# Altium PCB JWB-001.PcbDoc (part 2 of 2)
Units mil, origin at the board's own origin, x right, y up, seen from the top; angles counter-clockwise.
Board outline 944.88 x 944.88 mil, 4 copper layers (Top, Layer 2, Layer 3, Bottom), stack 35.2 mil thick; 91 components, 70 nets, 351 pads, 136 vias.
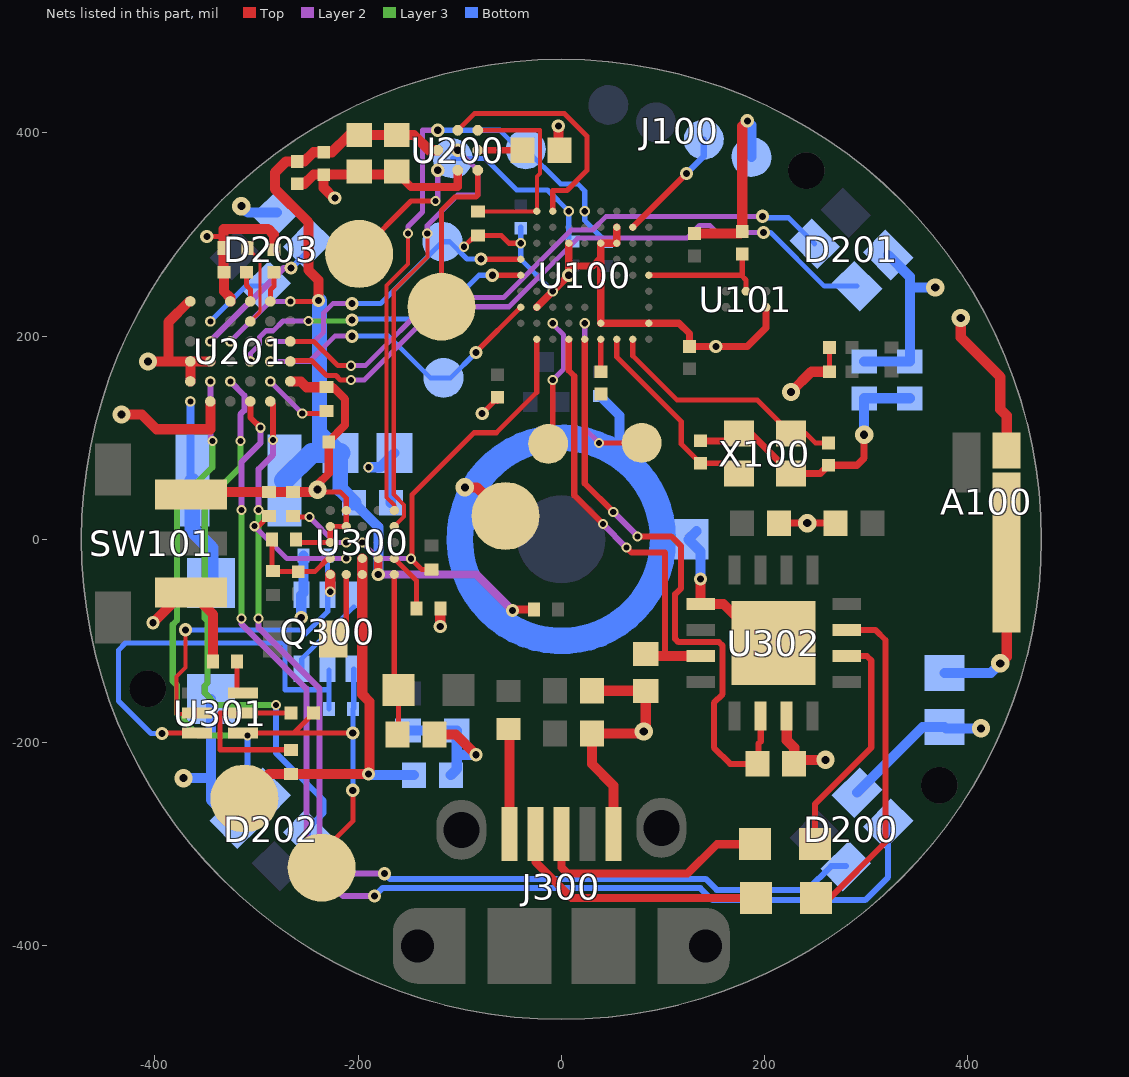
[diagram p4: the nets of this part, all layers, seen from the top]

## Via types
v1: diameter 13, hole 7, Top to Bottom, 27 vias
v2: diameter 10, hole 6, Top to Layer 2, 26 vias
v3: diameter 10, hole 6, Top to Layer 2, tented top, 17 vias
v4: diameter 10, hole 6, Layer 2 to Layer 3, 10 vias
v5: diameter 10, hole 6, Top to Bottom, tented both sides, 8 vias
v6: diameter 13, hole 7, Top to Layer 2, 7 vias
v7: diameter 13, hole 7, Layer 3 to Bottom, 6 vias
v8: diameter 13, hole 7, Top to Bottom, tented both sides, 6 vias
v9: diameter 18, hole 8, Top to Layer 2, tented top, 5 vias
v10: diameter 18, hole 8, Top to Bottom, tented both sides, 5 vias
v11: diameter 18, hole 8, Layer 3 to Bottom, tented bottom, 5 vias
v12: diameter 13, hole 7, Top to Layer 2, tented top, 4 vias
v13: diameter 18, hole 8, Top to Layer 2, 2 vias
v14: diameter 10, hole 6, Layer 3 to Bottom, tented bottom, 2 vias
v15: diameter 10, hole 6, Top to Bottom, 2 vias
v16: diameter 10, hole 6, Top to Bottom, tented top, 1 vias
v17: diameter 10, hole 6, Layer 3 to Bottom, 1 vias
v18: diameter 28, hole 16, Top to Bottom, 1 vias
v19: diameter 13, hole 7, Top to Bottom, tented top, 1 vias

## Nets (pads, with @x,y where several pads share a name; then routed paths per layer and width w, separated by ;. In a path a pad name is that pad's centre, name@x,y a point inside that pad or via, vN(x,y) a via of type N, cw(c..) or ccw(c..) an arc to the next point about the centre after c; other vN are vias at no path point) (continued)
GND: A100.2 A100.3 C100.2 C101.2 C102.2 C104.2 C105.2 C107.2 C108.2 C109.2 C110.2 C111.2 C200.2 C201.2 C204.2 C205.2 C206.2 C207.2 C208.2 C209.2 C210.2 C211.2 C213.2 C214.1 C300.2 C301.2 C302.2 C304.2 C305.2 C307.2 C308.2 C309.2 D301.2 D302.1 D303.2 J100.4 J300.5 Q300.1 R105.1 R200.1 R201.1 R202.1 R300.1 R301.1 R304.1 R307.1 R311.1 RT300.2 SW100.2 SW101.1 TP_GND.1 U100.B1 U100.B4 U100.C8 U100.D7 U100.G3 U100.G4 U100.G6 U100.G9 U100.H3 U101.B1 U200.B3 U201.A5 U201.D1 U201.E4 U201.F1 U201.F4 U201.F5 U300.A2 U300.B1 U300.B2 U300.C1 U300.E1 U302.3 U302.13 U302.17 X100.2 X100.4 | length 3513
  Top w5: v12(-349,298) -333.62,298 -332.62,297 ; R304.1@-258.19,-3 U300.C1@-227.5,-3 U300.B1@-227.5,12.75 U300.B2@-211.75,12.75 U300.A2@-211.75,28.5 -211.75,40.75 -217.81,46.81 v13@-242.19,46.81 ; v3(-96,288) -84.81,299.19 R200.1@-82,299.19 -59.19,299.19 -51.5,291.5 v5(-39.99,291.5) ; v12(-77.98,124) -63,138.98 C104.2@-63,136 ; C108.2@263.98,165 C107.2@263.98,189
  Top w7: U100.C8@-24.24,228.5 v5(-8.5,244.25) v6(7.25,260) 7.25,269 ; U100.G6@7.25,291.5 7.25,269 ; U100.H3@54.5,307.24 U100.G3@54.5,291.5 U100.G4@38.75,291.5 38.75,276.75 ; C102.2@137,97.02 167.7,97.02 X100.2@174.78,104.09 186.59,104.09 X100.4@225.96,64.72 254.75,64.72 C101.2@263,72.98 290.98,72.98 298,80 v10(298,103) ; U101.B1@201.37,228.5 201.37,208.37 183,190 v6(152,190) C105.2@126,190 126,202.51 115.76,212.76 U100.B1@85.99,212.76 U100.B4@38.75,212.76 38.75,276.75 ; C309.2@214.11,16 C308.2@269.89,16 ; 7.25,269 31,269 38.75,276.75
  Top w8: v13(-240,49) -240,54 -229.02,64.98 C211.2@-229.02,96 ; R202.1@-231,149.81 -224.81,149.81 -213,138 -213,112.47 C211.2@-229.02,96.45 ; C209.2@-162,361 -148,347 -102,347 U200.B3@-102,363.32
  Top w10: v9(-406.84,175.16) -386.84,175.16 ; v6(-402,-82) -372.23,-52.23 SW101.1@-364.57,-52.23 -342.81,-73.98 R307.1@-342.81,-120 ; U201.F1@-366.47,234.21 -386.84,213.84 -386.84,175.16 ; U201.F5@-365.21,155.47 U201.F4@-365.21,175.16 ; SW101.1@-361.98,46.81 R301.1@-288,46.81 RT300.2@-264,46.81 v13@-242.19,46.81 ; U201.E4@-345.53,175.16 U201.F4@-365.21,175.16 ; U201.D1@-325.84,234.21 -325.84,237.84 -332.02,244.02 C214.1@-332.02,263 -332.62,263.6 R201.1@-332.62,287 -332.62,297 -332.62,305.62 -288.62,305.62 -283,300 C213.2@-283,285 ; U201.A5@-266.79,155.47 -256.47,155.47 -250.81,149.81 R202.1@-231,149.81 ; C206.2@-260,350 -253,350 -244,359 C207.2@-234,359 ; v3(-227.5,-51.5) U300.E1@-227.5,-34.5 ; v6(-223,336) -224,336 -234,346 C207.2@-234,359 ; C209.2@-164.89,359 C207.2@-234,359 ; C301.2@-124.89,-192 -104,-192 v1(-84,-212) ; v6(-119.19,-85.81) R300.1@-119.19,-68 ; v13(-95,51.19) -83.19,51.19 TP_GND.1@-55,23 ; C210.2@-3,384.11 v12(-3,407) ; C307.2@30.11,-149 82.89,-149 D302.1@83,-149.11 v9@83,-187 ; J300.5@51.18,-289.74 51.18,-242.18 30.11,-221.11 D301.2@30.11,-191 v9@79,-191 ; C109.2@131,301.02 C110.2@176,301.02 ; U302.13@137,-63.46 v19(137,-39) ; U302.13@137.15,-63.61 159.61,-63.61 198,-102 U302.17@209,-102 ; C110.2@178,303.02 178,407 ; U302.3@221.8,-173.85 221.8,-197.8 229.11,-205.11 D303.2@229.11,-221 ; v10(226,145) 246,165 C108.2@263.98,165 ; D303.2@233.11,-217 v9(260,-217) ; v9(393,218) 393,199 432,160 432,128 438.29,121.71 A100.3@438.29,87.28 ; v10@438.29,-115.71 A100.2@438.29,-13.11 ; -386.84,175.16 U201.F4@-365.21,175.16
  Bottom w5: C111.2@-39.99,307.24 -39.99,275.75 v5(-8.5,244.25)
  Bottom w10: v1(-256,-77) -256,-54.99 Q300.1@-255.59,-54.58 ; Q300.1@-253.81,-52.8 R311.1@-253.81,-16 ; v5(-190,71) -178.43,71 C205.2@-167.89,81.54 ; C302.2@-167.89,36 C205.2@-167.89,81.54 ; C205.2@-164.43,85 C205.2@-167.89,81.54 ; C304.2@-151,-188.11 C305.2@-103,-188.11 -103,-226.11 C300.2@-108.89,-232 ; -98.11,-212 v1(-84,-212) ; R105.1@38,141.19 57.19,122 57.19,87.56 53.88,84.24 ; SW100.2@133,8 SW100.2@125,0 137,-12 v19(137,-39) ; v1(183,412) 187.12,407.88 J100.4@187.12,376.35 ; v10(298,103) C200.2@298,138.89 C201.2@343,138.89 ; C204.2@377,-131.43 422.57,-131.43 v10(432,-122)
  other v9: 81,-189 242,16
GREEN1: D200.3 U201.B6 | length 1015.4
  Top w6: v2(-283.98,97.98) U201.B6@-283.98,133.29
  Layer 2 w6: v4(-298,-78) -298,-87 -238,-147 -238,-309 -218,-329 v1(-174,-329) ; v4(-298,29) -298,69.04 -284.02,83.02 -284.02,97.94 v2(-283.98,97.98)
  Layer 3 w6: v4(-298,-78) v4(-298,29)
  Bottom w6: v1(-174,-329) -168.86,-334.14 142,-334.14 152.86,-345 242,-345 265.38,-321.62 D200.3@279.87,-321.62
GREEN2: D201.3 U201.A3 | length 596.1
  Top w5: U201.A3@-266.79,194.84 -243.84,194.84 -219.96,170.96 v2(-207.04,170.96)
  Layer 2 w5: v2(-207.04,170.96) -193.04,170.96 -126,238 -56.86,238 9.64,304.49 30.66,304.49 44.17,318 v1(198,318)
  Bottom w5: v1@199.38,316.62 223.62,316.62 D201.3@249.24,291
GREEN3: D202.3 U201.D5 | length 559.2
  Layer 2 w6: v2(-325.84,155.47) -312,141.63 -312,127 -316,123 v4(-316,97)
  Layer 3 w6: v4(-316,97) -316,71 -351,36 -351,-77.59 -348.5,-80.09 -348.5,-141.5 -351,-144 -351,-151 -339,-163 v17(-281,-163)
  Bottom w6: v17(-281,-163) -281,-210 -234,-257 -234,-269 -249.24,-284.24 D202.3@-249.24,-291
GREEN4: D203.3 U201.E2 | length 68.9
  Bottom w5: v15(-345.53,214.53) -310.81,249.24 D203.3@-291,249.24
HAP_EN: R200.2 U100.J8 U200.A1 | length 200.6
  Top w4: U200.A1@-82.31,402.69 -21.31,402.69 -21,403 -21,360 -24,357 -24,323.24 U100.J8@-24.24,322.99 -24.43,322.81 R200.2@-82,322.81
HAP_TRIG: U100.J7 U200.B1 | length 239
  Top w5: U200.B1@-102,402.69 -85.68,419 3,419 25,397 25,363 5.5,343.5 -8.5,343.5 U100.J7@-8.5,322.99
NetC100_1: C100.1 U100.A4 | length 31.7
  Top w5: C100.1@38.75,165.28 U100.A4@38.75,197.01
NetC101_1: C101.1 U100.A2 X100.1 | length 244.5
  Top w5: U100.A2@70.24,197.01 70.24,180.76 114,137 193.05,137 X100.1@225.96,104.09 240.91,104.09 249.98,95.02 C101.1@263,95.02
NetC102_1: C102.1 U100.A3 X100.3 | length 198.2
  Top w5: U100.A3@54.5,197.01 54.5,179.5 118,116 118,93.98 C102.1@137,74.98 164.52,74.98 X100.3@174.78,64.72
NetC110_1: C110.1 U100.E1 U101.A2 | length 130.1
  Top w5: U100.E1@85.99,260 177,260 ; C110.1@178,280.98 178,261 177,260 ; U101.A2@181.68,244.25 181.68,255.31 177,260
NetC210_1: C210.1 U200.A2 | length 44.2
  Top w6: U200.A2@-82.31,383 C210.1@-38.11,383
NetC213_1: C213.1 U201.B1 | length 30.2
  Top w5: U201.B1@-286.47,234.21 -286.47,245.47 -283,248.94 C213.1@-283,262.95
NetC214_2: C214.2 U201.C1 | length 30.4
  Top w5: C214.2@-309.98,263 -309.98,249.98 -306.16,246.16 U201.C1@-306.16,234.21
NetC301_1: C301.1 D300.C U300.E5 | length 153.8
  Top w5: D300.C@-164.5,-144.02 U300.E5@-164.5,-34.5 ; C301.1@-161.11,-192 -160.53,-191.42 D300.C@-160.53,-148
NetC303_2: C303.2 R304.2 R305.1 U300.D1 | length 98.1
  Top w5: R304.2@-288,3.19 R304.2@-284.81,0 -284.81,-30.19 R305.1@-284,-31 -283.21,-31.79 C303.2@-259,-31.79 -242.79,-31.79 -229.75,-18.75 U300.D1@-227.5,-18.75
NetC306_1: C306.1 R303.1 U301.5 | length 175.8
  Top w5: R303.1@-266.19,-207 -336,-207 -336,-171 U301.5@-313.36,-171 C306.1@-266.02,-171
NetC306_2: C306.2 Q300.4 R312.1 TP_BATT-.1 U301.4 | length 343.3
  Top w5: U301.4@-313.36,-190.68 -263.66,-190.68 ; C306.2@-243.98,-171 -263.66,-190.68 ; TP_BATT-.1@-236,-323 -236,-308 -205.32,-277.32 v1(-205.32,-247) ; v1(-205.32,-190.68) -263.66,-190.68
  Bottom w5: v1(-205.32,-247) v1(-205.32,-190.68) R312.1@-205.32,-167.13 ; R312.1@-204.41,-166.22 Q300.4@-204.41,-127.42
NetD204_A: D204.A L200.2 U201.F6 | length 187.1
  Bottom w8: v15(-365.21,135.79) -365.21,59.94 L200.2@-363.28,58
  Bottom w15: L200.2@-363.28,58 -363.28,9.28 -345,-9 D204.A@-345,-42.91
NetJ100_3: J100.3 U100.H2 | length 115.2
  Top w6: U100.H2@70.24,307.24 v1(123,360)
  Bottom w6: v1(123,360) 140.14,377.14 J100.3@140.14,393.45
NetJ300_1: J300.1 R308.1 | length 102.2
  Top w10: J300.1@-51.18,-289.74 R308.1@-51.18,-187.52
NetJ300_2: J300.2 R309.1 | length 259.5
  Top w8: J300.2@-25.59,-289.74 -25.59,-317.41 10,-353 R309.1@191.47,-353
NetJ300_3: J300.3 R310.1 | length 238.2
  Top w8: J300.3@0,-289.74 0,-323 6,-329 124,-329 153,-300 R310.1@190.47,-300
NetL300_1: L300.1 U300.E2 | length 68.8
  Top w5: L300.1@-224.44,-98 -211.75,-85.31 U300.E2@-211.75,-34.5
NetQ300_2: Q300.2 R311.2 U301.2 | length 311.7
  Top w4: v1(-370,-89) -370,-126 -379,-135 -379,-172 U301.2@-359.64,-172
  Bottom w5: v1(-370,-89) -256,-89 -252,-93 -230,-71 Q300.2@-230,-54.58 ; Q300.2@-230.19,-54.39 R311.2@-230.19,-16
NetQ300_3: Q300.3 Q300.6 | length 82.2
  Bottom w5: Q300.6@-255.59,-127.42 -255.59,-117.59 Q300.3@-204.41,-66.41
NetQ300_5: Q300.5 R312.2 U301.3 | length 434.8
  Top w5: v1@-392.68,-190.68 U301.3@-358.64,-190.68
  Bottom w5: v1(-393,-191) -404,-191 -436,-159 -436,-109 -429,-102 -272,-102 -272,-148 -228.81,-148 ; R312.2@-228.81,-167 -228.81,-148 ; Q300.5@-228.81,-128.61 -228.81,-148
NetR201_2: R201.2 U201.C2 | length 81.7
  Top w3: R201.2@-309,287 -296.5,274.5 -296.5,224.19 U201.C2@-306.16,214.53
NetR202_2: R202.2 U201.B5 | length 66.3
  Top w5: v2(-255.04,123.96) R202.2@-233.23,123.96
  Layer 2 w5: v2(-286.47,155.47) v2(-255.04,123.96)
NetR300_2: R300.2 U300.D5 | length 58.2
  Top w5: U300.D5@-164.5,-18.75 -142.81,-40.44 R300.2@-142.81,-68
NetR301_2: R301.2 U300.D2 | length 121.6
  Top w5: v3(-302,13) -298.19,13 R301.2@-288,23.19
  Layer 2 w5: v3(-302,13) -270.25,-18.75 v3(-211.75,-18.75)
NetR307_2: R307.2 U301.6 | length 25.5
  Top w5: -319.19,-145.49 R307.2@-319.19,-120
NetR309_2: R309.2 U302.7 | length 332.5
  Top w6: R309.2@250.53,-353 264,-353 319,-298 319,-99 309.2,-89.2 U302.7@280.85,-89.2
NetR310_2: R310.2 U302.6 | length 229.9
  Top w6: R310.2@249.53,-300 249.53,-260.47 305,-205 305,-119 300.8,-114.8 U302.6@280.85,-114.8
NetRT300_1: RT300.1 U300.C2 | length 63.1
  Top w5: RT300.1@-264,23.19 -262.81,22 v3(-248,22)
  Layer 2 w5: v3(-248,22) -223,-3 v3(-211.75,-3)
NetTP_LRA+_1: TP_LRA+.1 U200.A3 | length 161.4
  Top w5: TP_LRA+.1@-118,229 -118,324 -105,337 -84,337 -82.31,338.69 U200.A3@-82.31,363.32
NetTP_LRA-_1: TP_LRA-.1 U200.C3 | length 124.1
  Top w5: TP_LRA-.1@-199,282 -148,333 v3(-124,333)
  Layer 2 w5: v3@-121.68,335.32 v12(-121.68,363.32)
PMIC_INT: R306.1 U100.A8 U300.C3 | length 359.3
  Top w5: R306.1@-128,-29.81 -137.19,-29.81 v3(-148,-19) -147,-18 -147,44 -86,105 -64,105 -24.24,144.76 U100.A8@-24.24,197.01
  Layer 2 w5: v3(-196,-3) -180,-19 v3(-148,-19)
RED1: D200.4 U201.C6 | length 1141.8
  Top w6: U201.C6@-306,135.63 -306,119.92 v2(-296.04,109.96)
  Layer 2 w6: -315,-83 -251,-147 -251,-315 -215,-351 v1(-184,-351) ; v4(-315,29) -315,76.08 -296.04,95.04 v2(-296.04,109.96) v2(-296.04,109.96)
  Layer 3 w6: v4(-315,-78) v4(-315,29)
  Bottom w6: v1(-184,-351) -176.14,-343.14 136.86,-343.14 148.72,-355 299,-355 321.62,-332.38 D200.4@321.62,-279.86
RED2: D201.4 U201.A4 | length 652.5
  Top w5: U201.A4@-265.94,176 -246,176 -231.22,161.22 -221.83,161.22 -217.62,157 v2(-207,157)
  Layer 2 w5: v2(-207,157) -194,157 -122,229 -51.49,229 16,296.49 123.49,296.49 136,309 146,309 153,302 v1(199,302)
  Bottom w5: v1(199,302) 206,302 258.76,249.24 D201.4@291,249.24
RED3: D202.4 U201.E5 | length 488.1
  Layer 2 w6: v4@-345.53,99.03 v2(-345.53,155.47)
  Layer 3 w6: v4(-343.5,97) -343.5,71 -378.5,36 -378.5,-79.82 -382.5,-83.82 -382.5,-139.5 -378.5,-143.5 -378.5,-171.5 -357,-193 v14(-309,-193)
  Bottom w6: v14(-309,-193) -309,-231.24 D202.4@-291,-249.24 D202.4@-291,-246
RED4: D203.4 U201.E3 | length 140.4
  Layer 2 w6: v2(-345.53,194.84) -273.37,267 v1(-266,267)
  Bottom w6: v1(-266,267) -249.24,283.76 D203.4@-249.24,291
SCL: R101.1 TP_SCL.1 U100.J5 U200.C1 U300.A5 | length 635.2
  Top w4: U300.A5@-164.5,28.5 -164.5,33.6 -172,41.1 -172,250 -151,271 v3(-151,301)
  Layer 2 w5: v3(-151,301) -151,308 -136.68,322.32 -136.68,402.69 v8(-121.68,402.69)
  Bottom w5: v8(-121.68,402.69) -60.69,402.69 -42,384 TP_SCL.1@-35,384 -1,350 16,350 23,343 v5(23,322.99) 23,313.81 R101.1@44,292.81
SCLK: TP_SCLk.1 U100.F9 U201.B3 | length 305.1
  Top w5: v1@-78.75,275.75 U100.F9@-39.99,275.75
  Layer 2 w5: v2(-286.47,194.84) -243.16,194.84 -234,204 -234,223 -225,232 v1(-206,232)
  Bottom w5: v1(-206,232) -178,232 TP_SCLk.1@-117,293 -110,293 -93,276 v1(-79,276)
SDA: R102.1 TP_SDA.1 U100.J6 U200.B2 U300.B5 | length 594.3
  Top w4: U300.B5@-164.5,12.75 -164.5,13.07 -155,22.57 -155,34 -165,44 -165,245 -132,278 v3(-132,301)
  Layer 2 w5: v3(-132,301) -132,309 -102,339 -82.31,339 -82.31,363.31 v8(-102,383)
  Bottom w5: TP_SDA.1@-107,375 -75,375 -44,344 -13.76,344 v5(7.25,322.99) R102.1@7.25,296.75
SDI: TP_SDI.1 U100.C9 U201.B4 | length 302.3
  Top w5: v1@-84,184.5 U100.C9@-39.99,228.5
  Layer 2 w5: v2(-286.47,175.16) -247.84,175.16 -223,200 v1(-206,200)
  Bottom w5: v1(-206,200) -170,200 -129,159 TP_SDI.1@-116,159 -109,159 v1(-84,184)
SDO: TP_SDO.1 U100.E9 U201.C4 | length 308.2
  Top w5: v1(-68,260) U100.E9@-39.99,260
  Layer 2 w5: v2(-306.16,175.16) -306.16,182.84 -296.97,192.03 -296.97,199.19 -290.82,205.34 -283.66,205.34 -274,215 v4(-249,215)
  Layer 3 w5: v4(-249,215) v7@-207,215
  Bottom w5: v7@-206,217 -124,217 TP_SDO.1@-117,224 -81,260 v1(-68,260)
  other v7: -206,216
TP1: TP1.1 U100.B7 | length 122.1
  Top w5: TP1.1@-8.5,98.5 v3(-8.5,157)
  Layer 2 w5: v3(-8.5,157) 2,167.5 2,201.36 v3@-8.5,211.86
  other v3: -8.5,212.76
TP2: TP2.1 U100.B5 | length 165.6
  Top w5: v3(37,95) TP2.1@79,95
  Layer 2 w5: v3(23,212.76) 23,156 23,109 v3(37,95)
USB_UART_RX: D303.1 U100.A5 U302.2 | length 607.5
  Top w6: U100.A5@23,197.01 23,55 v2(51,27) ; v2(75,3) 108,3 117.75,-6.75 117.75,-48.25 112,-54 112,-98 115.11,-101.11 153.81,-101.11 153.92,-101 155,-101 158.71,-104.71 158.71,-152.29 150,-161 150,-205 166,-221 D303.1@192.89,-221 194,-219.89 194,-201 196.2,-198.8 U302.2@196.2,-173.85
  Layer 2 w6: v2(51,27) v2(75,3)
USB_UART_TX: D302.2 U100.A6 U302.15 | length 424.8
  Top w6: U100.A6@7.25,197.01 7.25,166.25 12.69,160.82 12.69,43.31 v2(41,15) ; v2(64,-8) 69,-13 101.73,-13 ; 102,-114.8 102,-13.27
  Top w10: D302.2@83,-112.89 84.91,-114.8 102,-114.8 U302.15@137.15,-114.8
  Layer 2 w6: v2(41,15) v2(64,-8)
VBATT: C300.1 R303.2 TP_BATT+.1 U300.D3 U300.E3 | length 391
  Top w7: v1(-189.81,-230.81) v1@-189,-230
  Top w10: TP_BATT+.1@-312,-255 -287.81,-230.81 R303.2@-266,-230.81 v1(-189.81,-230.81) ; U300.D3@-196,-18.75 U300.E3@-196,-34.5 -196,-152.5 -189,-159.5 v1@-189,-230
  Bottom w10: v1@-188.62,-232 C300.1@-145.11,-232
VLED: C200.1 C201.1 C204.1 D200.1 D201.1 D202.1 D203.1 D204.C U201.E6 | length 648
  Top w10: v10(-433,123) -413,123 -398.47,108.47 -345.53,108.47 U201.E6@-345.53,135.79
  Bottom w10: v11(-372,-235) -345,-235 ; D204.C@-345,-157.09 -345,-235 ; D202.1@-321.62,-279.87 -345,-256.49 -345,-235 ; v11(-315,328) -308.62,321.62 D203.1@-279.87,321.62 ; D200.1@291,-249.24 355.67,-184.57 C204.1@377,-184.57 ; C200.1@298,175.11 C201.1@343,175.11 343,258.49 D201.1@321.62,279.87 ; 344,248 v11(368,248) ; C204.1@378.43,-186 v11(413,-186)
VSYS: C205.1 C206.1 C207.1 C208.1 C209.1 C302.1 L200.1 R104.2 U200.C2 U201.A1 U201.D3 U300.D4 U300.E4 | length 979.4
  Top w5: v2(-266.79,234.21) v1@-239.79,234.21
  Top w8: v1(-180.25,-34.5) U300.D4@-180.25,-18.75 ; v6@-47,-69 R104.2@-27,-69
  Top w10: v1(-239,235) -239,255 -249,265 -249,312 -282,345 -282,361 -270.95,372.05 C206.1@-260,372.05 -252.95,372.05 -243.95,381.05 C207.1@-234,381.05 -225.95,381.05 -208.89,398.11 C208.1@-199,398.11 C209.1@-162,398.11 -145.11,398.11 -130,383 U200.C2@-121.68,383
  Layer 2 w5: v2(-325.84,194.84) -286.47,234.21 v2(-266.79,234.21)
  Layer 2 w8: v1(-180.25,-34.5) -83.5,-34.5 v6(-48,-70)
  Bottom w10: C302.1@-204.11,36 -180,11.89 v1@-180,-34.24
  Bottom w15: -238,96.43 -238,105.43 ; v1@-238,235 -238,105.43 ; C302.1@-204.11,36 -217.57,49.47 C205.1@-217.57,85 -238,105.43
  Bottom w20: L200.1@-272.72,58 -245.72,85 C205.1@-217.57,85
pads on no net: J300.4 J300.6 SW101.0 U100.B6 U100.B9 U100.C5 U100.C6 U100.C7 U100.D8 U100.E2 U100.E3 U100.E7 U100.E8 U100.F2 U100.F3 U100.F7 U100.F8 U100.G1 U100.G2 U100.G5 U100.G7 U100.G8 U100.H1 U100.H4 U100.H5 U100.H6 U100.H7 U100.J3 U100.J4 U201.D2 U201.D4 U201.F2 U300.A1 U300.A3 U300.A4 U300.B3 U300.B4 U300.C5 U301.1 U302.4 U302.5 U302.11 U302.12 U302.14 U302.16
copper on no net: | length 5.6
  Layer 2 w3: 56,195.5 54.5,197.01 57.99,197.01

## Polygon pours and split planes (outlines as drawn)
1V8 on Layer 3 "L3-1V8" (solid, remove dead copper, pour order 14): 363,108.54 363,230.78 363,234 253,344 201,396 201,397 -219,397 -220,398 -357.99,260.01 -364.7,260.01 -364.7,190.74 -399.8,155.64 -398.86,154.7 -398.86,-171.88 -398.86,-187.14 -265.85,-320.15 -244.67,-341.33 -194.94,-341.33 -169.37,-341.33 -159.66,-351.04 -159.32,-351.38 141.11,-351.38 206.62,-351.38 211,-347 353.56,-204.44 353.56,-98
VLED on Layer 3 "L3-VLED" (solid, remove dead copper, pour order 12): 363,-4.22 363,235 349,249 201,397 -42,397 -43,398 -219,398 -220,398 -330,288 -367.53,250.47 -399.8,155.64 -383.25,28.51 -399.96,-186.04 -346,-240 -265.85,-320.15 -161.28,-351.38 -159.66,-351.04 139.09,-350.96 202,-364 353.56,-98 460,-98 485.37,82.37 460,124.01 404.56,257.86 287.6,374.81 281.3,381.11 239.63,408.96 132.42,453.36 38.73,472 -49.45,472 -108.86,460.56 -250.88,403.76 -337.88,320.93 -379.83,269.82 -414.75,217.56 -430,180.74 -454.16,122.41 -458.4,79.4 -456.78,77.78 -456.78,-122.39 -456.78,-205.64 -374.81,-287.6 -195.42,-467 23.63,-467 158,-467 275,-417 574,-118 512,-56 512,55.73 480.35,130.33
GND on Layer 2 "L3-GND" (solid, remove dead copper, pour order 18): 461,107 415,218.05 415,262 414,262 254,422 191,485 -17,485 -232,485 -383,334 -485,232 -485,-249 -485,-251 -348,-388 -347,-388 -272,-463 -257,-478 281,-478 281,-455 511,-225 498,-212 498,137 498,150 415,233
GND on Top "Top-GND" (solid, remove dead copper, pour order 20): -540,512 -537,509 506,509 506,-520 510,-524 508,-522 -547,-522
GND on Bottom "Bottom-GND" (solid, remove dead copper, pour order 22): -551,528 565,528 599,494 584,479 584,-503 -548,-503 -551,-506

## Keep-outs
Keep-Out Layer:
  circle w3.94: c0,0 r472.44

## Silkscreen, mask and mechanical layers (free items; w line width, h text height)
Top Overlay:
  text "LRA-" at -232,215 h15
  text "LRA+" at -139,160 h15
  text "B+" at -264,-268 h15
  text "B-" at -254,-391 h15
Bottom Overlay:
  drawing of 659 lines, arcs and shapes, not listed
  text "v3.5" at 305,-92 h15
Board Outline:
  circle w3.94: c0,0 r472.44
TitleBlock_Top:
  lines w5: -2765,-840 -2565,-840 ; -2765,1285 -2565,1285 ; -2765,3410 -2565,3410 ; -2565,-1565 -2565,-2765 ; -15,-2965 -15,-2765 ; -15,5335 -15,5535 ; 2735,-2965 2735,-2765 ; 2735,5335 2735,5535 ; 3335,-2765 1935,-2765 -2565,-2765 ; 3535,-2465 8035,-2465 ; 3535,-2165 8035,-2165 ; 3535,-1865 5035,-1865 ; 5035,-2765 5035,-2165 5035,-1565 ; 5485,-2965 5485,-2765 ; 5485,5335 5485,5535 ; 7135,-2765 7135,-2165 ; 8035,-840 8235,-840 ; 8035,1285 8235,1285 ; 8035,3410 8235,3410 ; -2565,-2765 -2565,5335 8035,5335 8035,-2765 ; -2565,-2765 8035,-2765 ; 3535,-2765 2135,-2765 2135,-1565 3535,-1565 ; 3535,-2765 8035,-2765 ; 3535,-2765 3535,-1565 ; 3535,-1565 5035,-1565 ; 5035,-1565 8035,-1565 8035,-2765 ; -2765,-2965 8235,-2965 8235,5535 -2765,5535 -2765,-2965
  text "1" at -1413.66,5400 h70
  text "2" at 1337,5400 h70
  text "3" at 4082,5400 h70
  text "4" at 6833.01,5400 h70
  text "A" at -2690,4382 h70
  text "A" at 8110,4382 h70
  text "B" at -2690,2257 h70
  text "B" at 8110,2257 h70
  text "C" at -2690,132 h70
  text "C" at 8110,132 h70
  text "ENGINEER:" at 3585,-1665 h45
  text "TITLE:" at 5085,-1665 h45
  text ".Engineer" at 3985,-1775 h100
  text "PCB DESIGNER:" at 3585,-1960 h45
  text "D" at -2690,-1988 h70
  text "D" at 8110,-1988 h70
  text ".Engineer" at 4010,-2100 h100
  text "DATE:" at 3585,-2265 h45
  text "PART NO.:" at 5085,-2265 h45
  text "REV:" at 7185,-2265 h45
  text ".Company" at 2287,-2371 h70
  text ".PRINT_DATE" at 3635,-2385 h70
  text ".Address1" at 2287,-2471 h70
  text ".Address2" at 2290,-2563 h70
  text "FILE NAME:" at 3585,-2565 h45
  text "DWG NO:" at 5085,-2565 h45
  text "SCALE:" at 7185,-2565 h45
  text ".Address3" at 2285,-2665 h70
  text ".PCB_FILE_NAME_NO_PATH" at 3635,-2685 h70
  text "1" at -1413.66,-2900 h70
  text "2" at 1337,-2900 h70
  text "3" at 4082,-2900 h70
  text "4" at 6833.01,-2900 h70
Drill Drawing:
  drawing of 391 lines, arcs and shapes, not listed
  text "NOTES: UNLESS OTHERWISE SPECIFIED" at 4120,4805 h60
  text "1. MATERIAL: COPPER CLAD PLASTIC SHEET PER IPC-4101" at 4120,4645 h60
  text "ROHS COMPLIANT TG 170 FR-4" at 4280,4525 h60
  text "TYPE GFN FINISHED COPPER WEIGHT TO BE: 1 OZ." at 4280,4405 h60
  text "OVERALL BOARD THICKNESS TO BE .036+/-.005." at 4280,4285 h60
  text "Symbol" at -2213.5,4226.94 h72
  text "Hit Count" at -1707.62,4226.94 h72
  text "Finished Hole Size" at -1009.81,4226.94 h72
  text "Plated" at 335.79,4226.94 h72
  text "Hole Type" at 841.67,4226.94 h72
  text "Physical Length" at 1575.47,4226.94 h72
  text "Rout Path Length" at 2717.14,4226.94 h72
  text "2. UNLESS OTHERWISE SPECIFIED ALL HOLE DIMENSIONS" at 4120,4165 h60
  text "1" at -1707.62,4076.94 h60
  text "16.00mil (0.406mm)" at -1009.81,4076.94 h60
  text "PTH" at 335.79,4076.94 h60
  text "Round" at 841.67,4076.94 h60
  text "-" at 1575.47,4076.94 h60
  text "-" at 2717.14,4076.94 h60
  text "APPLY AFTER PLATING." at 4300,4025 h60
  text "2" at -1707.62,3926.94 h60
  text "32.48mil (0.825mm)" at -1009.81,3926.94 h60
  text "PTH" at 335.79,3926.94 h60
  text "Slot" at 841.67,3926.94 h60
  text "59.06mil (1.500mm)" at 1575.47,3926.94 h60
  text "26.57mil (0.675mm)" at 2717.14,3926.94 h60
  text "3. ALL HOLES SHALL BE LOCATED WITHIN 0.003 DIAMETER OF" at 4120,3845 h60
  text "2" at -1707.62,3776.94 h60
  text "35.43mil (0.900mm)" at -1009.81,3776.94 h60
  text "PTH" at 335.79,3776.94 h60
  text "Slot" at 841.67,3776.94 h60
  text "39.37mil (1.000mm)" at 1575.47,3776.94 h60
  text "3.94mil (0.100mm)" at 2717.14,3776.94 h60
  text "TRUE POSITION.  LAYER TO LAYER REGISTRATION SHALL BE" at 4280,3725 h60
  text "3" at -1707.62,3626.94 h60
  text "35.98mil (0.914mm)" at -1009.81,3626.94 h60
  text "NPTH" at 335.79,3626.94 h60
  text "Round" at 841.67,3626.94 h60
  text "-" at 1575.47,3626.94 h60
  text "-" at 2717.14,3626.94 h60
  text "WITHIN 0.003.  ADD TEARDROPS AS REQUIRED SO THAT ALL" at 4280,3605 h60
  text "HOLES SURROUNDED BY LAND SHALL HAVE A MINIMUM ANNULAR" at 4280,3485 h60
  text "5" at -1707.62,3476.94 h60
  text "8.00mil (0.203mm)" at -1009.81,3476.94 h60
  text "PTH" at 335.79,3476.94 h60
  text "Round" at 841.67,3476.94 h60
  text "-" at 1575.47,3476.94 h60
  text "-" at 2717.14,3476.94 h60
  text "RING OF 0.002." at 4280,3365 h60
  text "11" at -1707.62,3326.94 h60
  text "6.00mil (0.152mm)" at -1009.81,3326.94 h60
  text "PTH" at 335.79,3326.94 h60
  text "Round" at 841.67,3326.94 h60
  text "-" at 1575.47,3326.94 h60
  text "-" at 2717.14,3326.94 h60
  text "4. CONDUCTOR WIDTHS AND SPACING SHALL BE WITHIN +/- 20%" at 4120,3185 h60
  text "34" at -1707.62,3176.94 h60
  text "7.00mil (0.178mm)" at -1009.81,3176.94 h60
  text "PTH" at 335.79,3176.94 h60
  text "Round" at 841.67,3176.94 h60
  text "-" at 1575.47,3176.94 h60
  text "-" at 2717.14,3176.94 h60
  text "OF ARTWORK ORIGINALS." at 4280,3065 h60
  text "58 Total" at -1707.62,3026.94 h60
  text "5. APPLY SOLDERMASK (LIQUID PHOTO IMAGEABLE) OVER BARE" at 4120,2905 h60
  text "Slot definitions :" at -2213.5,2881.97 h60
  text "Rout Path Length" at -1180.81,2881.97 h60
  text "= Calculated from tool start centre position to tool end centre position." at -198.1,2881.97 h60
  text "COPPER, SOLDERMASK TO BE PER IPC-SM-840, CLASS T," at 4280,2785 h60
  text "Physical Length" at -1180.81,2781.99 h60
  text "= Rout Path Length + Tool Size = Slot length as defined in the PCB layout" at -258.09,2781.99 h60
  text "COLOR: TRANSPARENT GREEN.  ALL EXPOSED CONDUCTIVE" at 4280,2665 h60
  text "Layer" at -2243,2568 h60
  text "Name" at -1833.09,2568 h60
  text "Material" at -903.34,2568 h60
  text "Thickness" at -43.58,2568 h60
  text "Constant" at 606.26,2568 h60
  text "Board Layer Stack" at 1176.12,2568 h60
  text "SURFACES TO BE IMMERSION GOLD OVER ELECTROLESS NICKEL" at 4280,2545 h60
  text "1" at -2243,2448 h60
  text "Top Overlay" at -1833.09,2448 h60
  text "(ENIG) PER IPC-4552." at 4280,2425 h60
  text "2" at -2243,2328 h60
  text "Top Solder" at -1833.09,2328 h60
  text "Solder Resist" at -903.34,2328 h60
  text "0.40mil" at -43.58,2328 h60
  text "3.5" at 606.26,2328 h60
  text "6. WARP OR TWIST OF BOARD SHALL NOT EXCEED 0.75%." at 4120,2245 h60
  text "3" at -2243,2208 h60
  text "Top" at -1833.09,2208 h60
  text "Copper" at -903.34,2208 h60
  text "1.40mil" at -43.58,2208 h60
  text "4" at -2243,2088 h60
  text "Core 1" at -1833.09,2088 h60
  text "370HR" at -903.34,2088 h60
  text "6.00mil" at -43.58,2088 h60
  text "4.02" at 606.26,2088 h60
  text "7. APPLY SILKSCREEN, AS REQUIRED, USING WHITE EPOXY INK." at 4120,2085 h60
  text "5" at -2243,1968 h60
  text "Layer 2" at -1833.09,1968 h60
  text "Copper" at -903.34,1968 h60
  text "0.70mil" at -43.58,1968 h60
  text "8. REMOVE ALL BURRS AND BREAK SHARP EDGES 0.001 MAX." at 4120,1925 h60
  text "6" at -2243,1848 h60
  text "Core 2" at -1833.09,1848 h60
  text "370HR" at -903.34,1848 h60
  text "19.00mil" at -43.58,1848 h60
  text "4.02" at 606.26,1848 h60
  text "9. FABRICATE IN ACCORDANCE WITH IPC-6012, TYPE 2, CLASS 2." at 4120,1785 h60
  text "7" at -2243,1728 h60
  text "Layer 3" at -1833.09,1728 h60
  text "Copper" at -903.34,1728 h60
  text "0.70mil" at -43.58,1728 h60
  text "10. DIMENSIONS AND TOLERANCES PER ANSI Y14.5." at 4080,1625 h60
  text "8" at -2243,1608 h60
  text "Core 3" at -1833.09,1608 h60
  text "370HR" at -903.34,1608 h60
  text "6.00mil" at -43.58,1608 h60
  text "4.02" at 606.26,1608 h60
  text "9" at -2243,1488 h60
  text "Bottom" at -1833.09,1488 h60
  text "Copper" at -903.34,1488 h60
  text "1.40mil" at -43.58,1488 h60
  text "11. SURFACE MOUNT PAD SOLDER PLATING MUST BE FLAT TO A" at 4080,1445 h60
  text "10" at -2243,1368 h60
  text "Bottom Solder" at -1833.09,1368 h60
  text "Solder Resist" at -903.34,1368 h60
  text "0.40mil" at -43.58,1368 h60
  text "3.5" at 606.26,1368 h60
  text "MAXIMUM OF 0.001 ABOVE BOARD SURFACE." at 4300,1305 h60
  text "11" at -2243,1248 h60
  text "Bottom Overlay" at -1833.09,1248 h60
  text "12. ALL COPPER SET BACK MUST BE MAINTAINED WITHIN ARTWORK" at 4080,1145 h60
  text "ORIGINALS FROM ANY EDGE OF P.C. BOARD (i.e O.D., I.D," at 4300,1025 h60
  text "NON-PLATED THROUGH HOLES, NON-PLATED RADIUS, GROOVES" at 4300,905 h60
  text "AND SLOTS)." at 4300,765 h60
  text "13. ALL VIAS TO BE TENTED UNLESS EXPLICITLY CLEARED IN GERBERS" at 4080,585 h60
  text "14. DO NOT CHANGE GERBERS WITHOUT WRITTEN APPROVAL" at 4080,405 h60
  text "15. PCB AND ASSEMBLY MUST BE ROHS COMPLIANT" at 4080,245 h60
  text ".PCB_Title" at 5525,-1810 h100
  text "Fab Drawing" at 5795,-2055 h100
  text ".PCB_PartNumber" at 5470,-2380 h100
  text ".PCB_Rev" at 7370,-2405 h100
TitleBlock_Bot:
  lines w5: -2765,-840 -2565,-840 ; -2765,1285 -2565,1285 ; -2765,3410 -2565,3410 ; -2565,-2465 1935,-2465 ; -2565,-2165 1935,-2165 ; -2565,-1565 435,-1565 ; -1665,-2765 -1665,-2165 ; -15,-2965 -15,-2765 ; -15,5335 -15,5535 ; 435,-2765 435,-2165 435,-1565 ; 435,-1865 1935,-1865 ; 1935,-2765 1935,-1565 ; 2735,-2965 2735,-2765 ; 2735,5335 2735,5535 ; 3335,-2765 3335,-1565 1935,-1565 ; 5485,-2965 5485,-2765 ; 5485,5335 5485,5535 ; 8035,-840 8235,-840 ; 8035,1285 8235,1285 ; 8035,3410 8235,3410 ; 435,-1565 1935,-1565 ; -2765,-2965 8235,-2965 8235,5535 -2765,5535 -2765,-2965 ; -2565,-2765 8035,-2765 8035,5335 -2565,5335 -2565,-2765
  text "4" at -1363.01,5400 h70
  text "3" at 1388,5400 h70
  text "2" at 4133,5400 h70
  text "1" at 6883.66,5400 h70
  text "ASSEMBLY NOTES (UNLESS SPECIFIED OTHERWISE)" at 7660,4385 h100
  text "A" at -2640,4382 h70
  text "A" at 8160,4382 h70
  text "1. ALL PARTS FLUSH TO PCB" at 7660,4185 h100
  text "2. TRIM LEADS TO <=0.100\"" at 7670,4000 h100
  text "B" at -2640,2257 h70
  text "B" at 8160,2257 h70
  text "C" at -2640,132 h70
  text "C" at 8160,132 h70
  text "TITLE:" at 385,-1665 h45
  text "ENGINEER:" at 1885,-1665 h45
  text ".PCB_Title" at -310,-1760 h100
  text ".ENGINEER" at 1415,-1770 h100
  text "PCB DESIGNER:" at 1885,-1960 h45
  text "D" at -2640,-1988 h70
  text "D" at 8160,-1988 h70
  text "BOTTOM ASSEMBLY DRAWING" at 55,-2035 h100
  text ".ENGINEER" at 1420,-2095 h100
  text "REV:" at -1715,-2265 h45
  text "PART NO.:" at 385,-2265 h45
  text "DATE:" at 1885,-2265 h45
  text ".PCBA_Rev" at -1885,-2360 h80
  text ".PCBA_PartNumber" at -60,-2365 h80
  text ".Company" at 3186,-2370 h70
  text ".PRINT_DATE" at 1835,-2385 h70
  text ".Address1" at 3186,-2470 h70
  text ".Address2" at 3185,-2564 h70
  text "SCALE:" at -1715,-2565 h45
  text "DWG NO:" at 385,-2565 h45
  text "FILE NAME:" at 1885,-2565 h45
  text ".Address3" at 3185,-2665 h70
  text ".PCB_FILE_NAME_NO_PATH" at 1835,-2685 h70
  text "4" at -1363.01,-2900 h70
  text "3" at 1388,-2900 h70
  text "2" at 4133,-2900 h70
  text "1" at 6883.66,-2900 h70
TopFabNotes:
  text "ASSEMBLY NOTES (UNLESS SPECIFIED OTHERWISE)" at 3445,4820 h100
  text "1. ALL PARTS FLUSH TO PCB" at 3470,4570 h100
  text ".PCB_Title" at 5525,-1810 h100
  text "Assembly Drawing" at 5570,-2055 h100
  text ".PCBA_PartNumber" at 5470,-2380 h100
  text ".PCBA_Rev" at 7370,-2405 h100

## Dimensions
0,-472.44 to 0,472.44 on Drill Drawing